# Altium PCB JVersiePCBSoldeerstation.PcbDoc
Units mil, origin at the board's own origin, x right, y up, seen from the top; angles counter-clockwise.
Board outline 3400 x 3820 mil, 2 copper layers (Top Layer, Bottom Layer); 64 components, 59 nets, 212 pads, 29 vias.
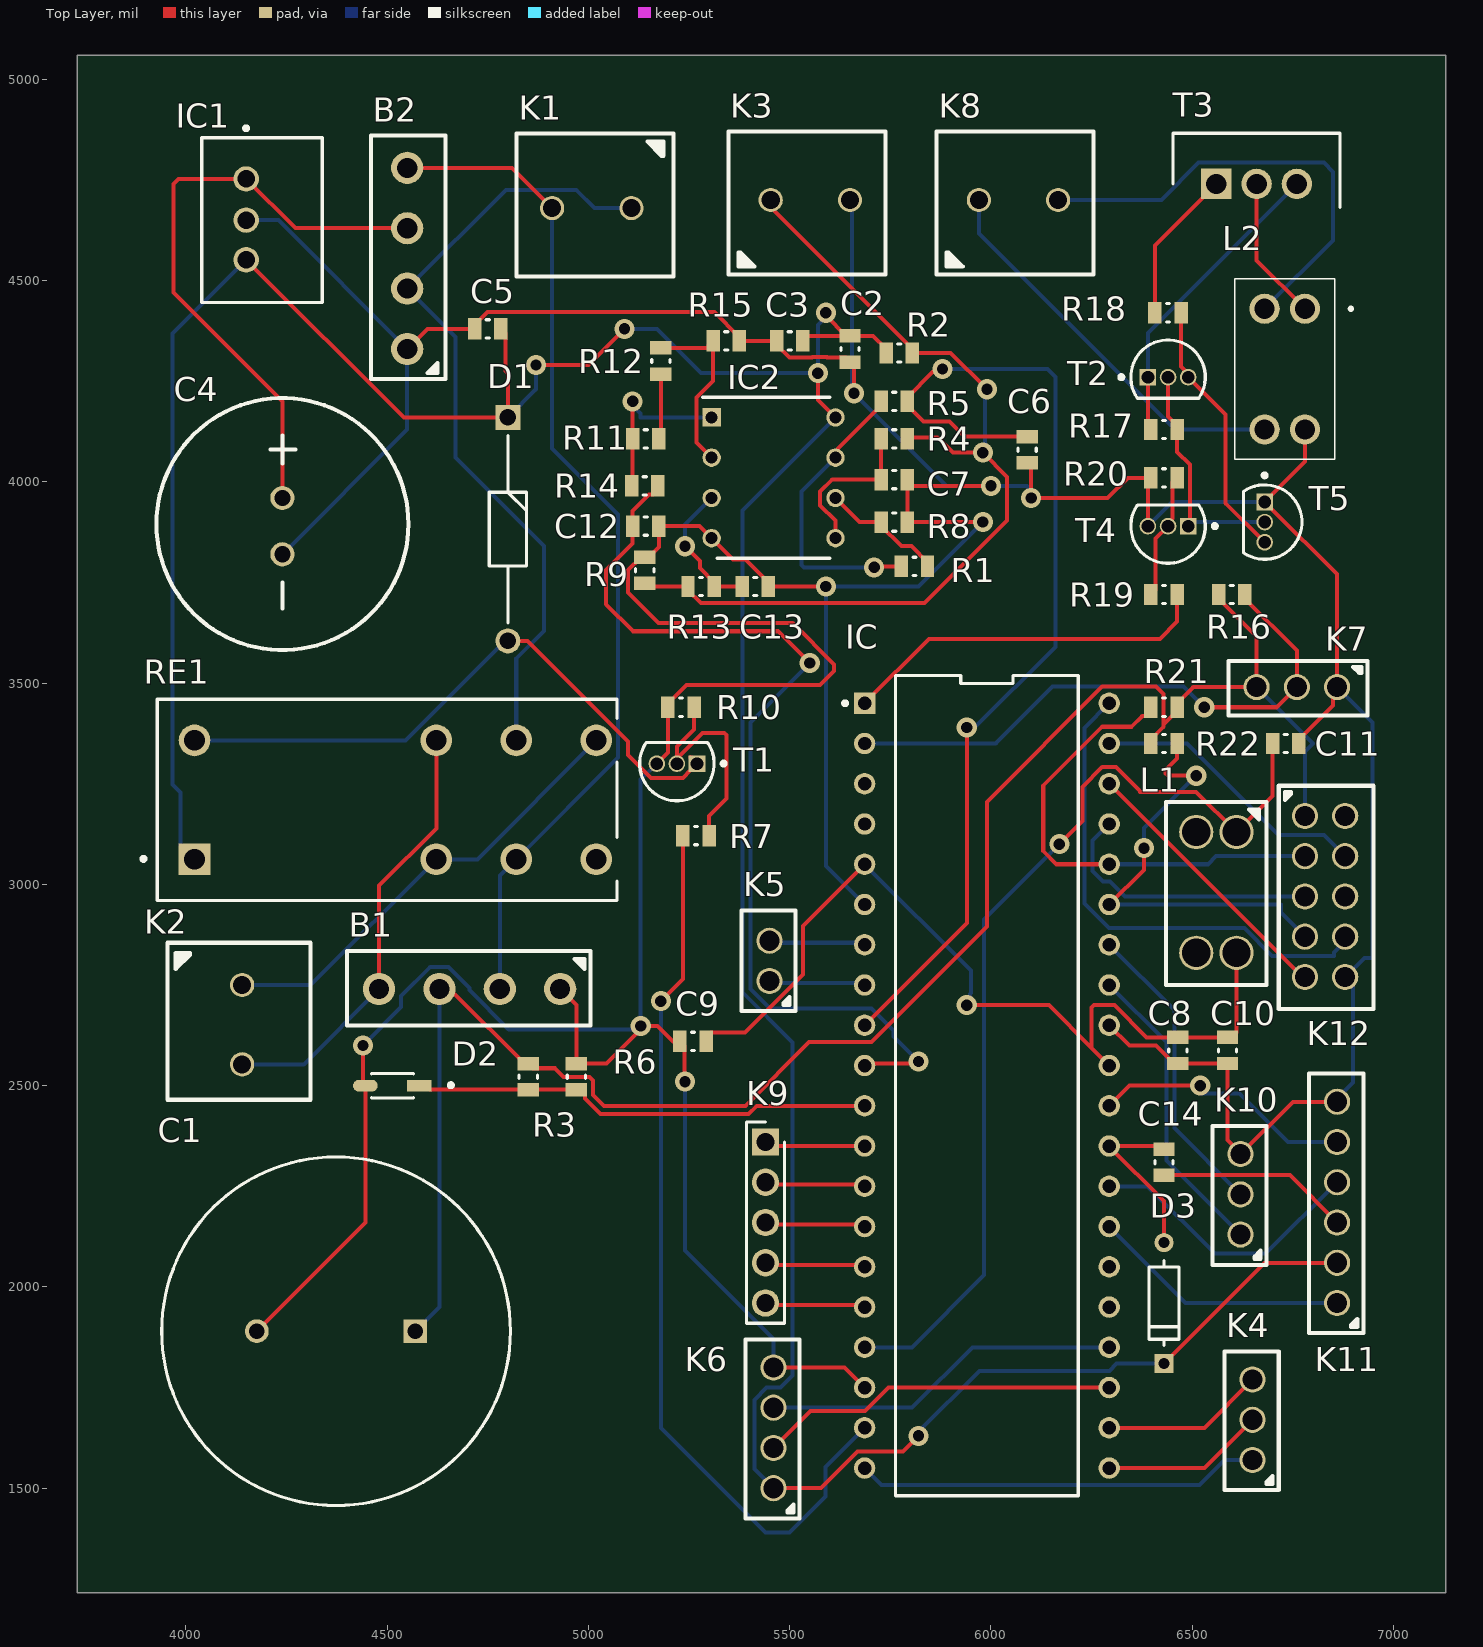
[diagram p0: Top Layer view]
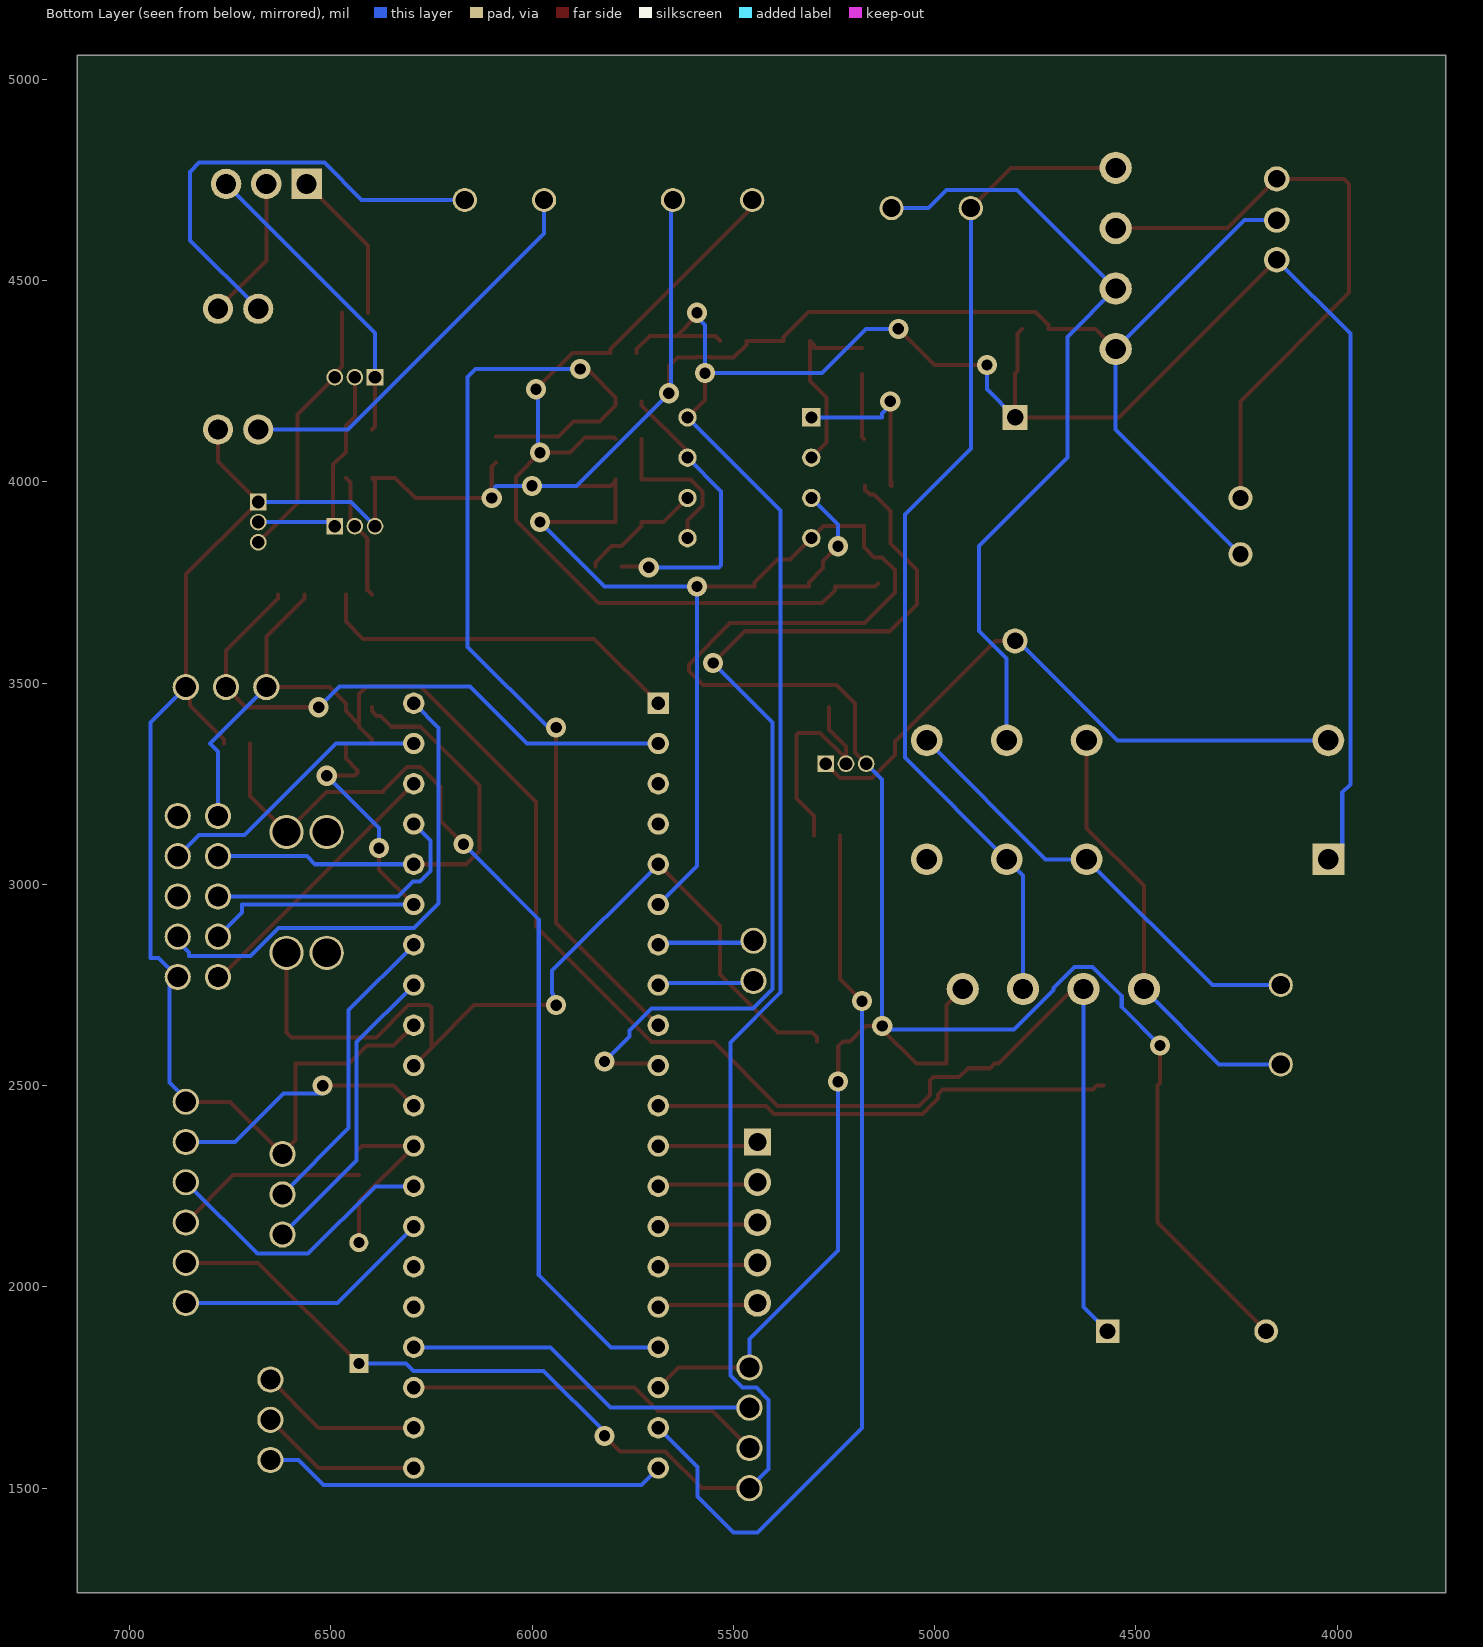
[diagram p1: Bottom Layer view, seen from below]

## Layer stack, top to bottom
Top Solder: solder mask 0.4, Solder Resist, Dk 3.5
Top Layer: signal copper 1.4
Dielectric 1: dielectric 12.6, FR-4, Dk 4.8
Bottom Layer: signal copper 1.4
Bottom Solder: solder mask 0.4, Solder Resist, Dk 3.5

## Board outline
3730,1240 7130,1240 7130,5060 3730,5060

## Design rules (kind name [scope] priority, off if disabled: settings)
Clearance [All] p1: gap=10 ignorepadtopadclearanceinfootprint=FALSE except(0: Arc-Hole Track-Hole SMDPad-Hole THPad-Hole Via-Hole Fill-Hole Poly-Hole Region-Hole Text-Hole)
PolygonConnect [All] p1: connectstyle=Relief reliefconductorwidth=10 reliefentries=4 polygonreliefangle="90 Angle" airgapwidth=10
RoutingVias [All] p1: holewidth=28 width=50 viastyle="Through Hole" minholewidth=28 minwidth=50 maxholewidth=28 maxwidth=50
SolderMaskExpansion [All] p1: expansion=4 istentingtop=FALSE
Width [All] p1: maxlimit=10 minlimit=10 preferedwidth=10
30 further rules are at their usual default settings.

## Classes and differential pairs
component class voeding: B1 B2 C1 C4 C5 D1 D2 IC1 K1 K2 R3 R6 R7 R10 RE1 T1
component class thermokoppel: K8 L2 R17 R18 R19 R20 T2 T3 T4 T5
component class soldeerboutaansturing: C2 C3 C6 C7 C12 C13 IC2 R1 R2 R4 R5 R8 R9 R11 R12 R13 R14 R15
component class cpuofmicrocontroller: C8 C9 C10 C11 C14 D3 IC K4 K5 K6 K7 K9 K10 K11 K12 L1 R16 R21 R22

## Components (designator, comment, footprint, x,y, rotation, side; value= is the part's Value field where it differs from the comment)
B1 "D6KB6U" D6KB6U 4930,2740 r180 top
B2 "D6KB6U" D6KB6U 4550,4330 r90 top
C1 "4700µ" CAPPRD1000W80D2200H3700 4570,1890 r180 top
C2 "" RESC2013X50X30LL20T20 5650,4330 r270 top value="0.10 μF"
C3 "" RESC2013X50X30LL20T20 5500,4350 r180 top
C4 "100µ" "100uF/50v aluminum electrolytic capacitor" 4240,3960 r270 top value="0.10 μF"
C5 "10µ" RESC2013X50X30LL20T20 4750,4380 r180 top value="0.10 μF"
C6 "10n" RESC2013X50X30LL20T20 6090,4080 r270 top
C7 "10n" RESC2013X50X30LL20T20 5760,4005.55 r0 top
C8 "100n" RESC2013X50X30LL20T20 6464.45,2587.52 r270 top
C9 "100n" RESC2013X50X30LL20T20 5260,2610 r180 top
C10 "10µ" RESC2013X50X30LL20T20 6587.57,2587.52 r270 top value="0.10 μF"
C11 "100n" RESC2013X50X30LL20T20 6732.48,3350 r0 top
C12 "10n" RESC2013X50X30LL20T20 5142.48,3890 r0 top
C13 "10n" RESC2013X50X30LL20T20 5414.83,3740 r0 top
C14 "100n" RESC2013X50X30LL20T20 6430,2310 r90 top
D1 "1N4007" DIOAD1405W86L465D235 4800,4160 r270 top
D2 "5V1" FP-SOD123-IPC_A 4513.06,2500 r180 top
D3 "1N4148" FP-017AG-MFG 6430,1960 r90 top
IC "ATMEGA4809-PF" FP-C04-016-MFG 5990,2500 r0 top
IC1 "" MURA-OKI-78SR-3 4150,4650 r270 top
IC2 "OPAMP" DIP781W56P254L950H533Q8N 5460,4010 r0 top
K1 "printkroonsteen 2pin" "printkroonsteen 2pin" 5107,4680 r180 top
K2 "printkroonsteen 2pin" "printkroonsteen 2pin" 4140,2750 r270 top
K3 "printkroonsteen 2pin" "printkroonsteen 2pin" 5453,4700 r0 top
K4 "" "PINHEADER, 1RIJIG,3-POLIG" 6650,1570 r90 top
K5 "" Pinheader,1rijig,2-polig 5450,2760 r90 top
K6 "" "PINHEADER, 1RIJIG,4-POLIG - duplicate" 5460,1500 r90 top
K7 "Pinheader,1rijig,3-polig" "PINHEADER, 1RIJIG,3-POLIG" 6860,3490 r180 top
K8 "" "printkroonsteen 2pin" 5970,4700 r0 top
K9 "" HDRV5W67P0X254_1X5_1270X241X858P 5440,2360 r270 top
K10 "" "PINHEADER, 1RIJIG,3-POLIG" 6620,2130 r90 top
K11 "" "PINHEADER, 1RIJIG,6-POLIG - duplicate - duplicate" 6860,1960 r90 top
K12 "Pinheader,2rijig,10-polig" "PINHEADER, 2RIJIG,10-POLIG - duplicate - duplicate - duplicate" 6780,3170 r270 top
L1 "10µH" "Laird CM2545x171B-10" 6610,3130 r180 top
L2 "CM2545X171B-10" CM2545X171B10 6780,4430 r180 top
R1 "18K" RESC2013X50X30LL20T20 5810,3790 r0 top
R2 "1M" RESC2013X50X30LL20T20 5772.48,4320 r180 top
R3 "68K" RESC2013X50X30LL20T20 4850.66,2522.48 r90 top
R4 "5K6" RESC2013X50X30LL20T20 5760,4106.9 r0 top
R5 "5K6" RESC2013X50X30LL20T20 5760,4200 r180 top
R6 "10K" RESC2013X50X30LL20T20 4970,2522.48 r270 top
R7 "10K" RESC2013X50X30LL20T20 5267.52,3121.04 r0 top
R8 "100" RESC2013X50X30LL20T20 5760,3900 r180 top
R9 "10M" RESC2013X50X30LL20T20 5140,3780 r270 top
R10 "4K7" RESC2013X50X30LL20T20 5230,3440 r0 top
R11 "10K" RESC2013X50X30LL20T20 5142.48,4106.9 r0 top
R12 "18K" RESC2013X50X30LL20T20 5180,4300 r90 top
R13 "5K6" RESC2013X50X30LL20T20 5280,3740 r180 top
R14 "5K6" RESC2013X50X30LL20T20 5140,3990 r0 top
R15 "100" RESC2013X50X30LL20T20 5342.31,4350 r180 top
R16 "4k7" RESC2013X50X30LL20T20 6597.97,3720 r0 top
R17 "4K7" RESC2013X50X30LL20T20 6430,4130 r0 top
R18 "100" RESC2013X50X30LL20T20 6440,4420 r180 top
R19 "10k" RESC2013X50X30LL20T20 6430,3720 r180 top
R20 "4K7" RESC2013X50X30LL20T20 6430,4010 r180 top
R21 "4k7" RESC2013X50X30LL20T20 6430,3440 r0 top
R22 "4k7" RESC2013X50X30LL20T20 6430,3350 r180 top
RE1 "" FP-RT424005-MFG 4500,3210 r0 top
T1 "BC547C" ONSC-TO-92-3-29-11 5220,3300 r180 top
T2 "BC547C" ONSC-TO-92-3-29-11 6440,4260 r0 top
T3 "IRF9Z34NPBF" TO254P469X1042X1967-3P 6560,4740 r0 top
T4 "BC547C" ONSC-TO-92-3-29-11 6440,3890 r180 top
T5 "BC557C" ONSC-TO-92-3-29-11 6680,3900 r270 top

## Footprints (in the part's own frame and the unit in brackets; to place one, negate y for a bottom-side part, rotate by r counter-clockwise, add the part's x,y. Pads: shape width x height; smd on the part's side, far side on the other; paste and mask are expansions set on the pad)
"100uF/50v aluminum electrolytic capacitor" [mil]
  round 60 hole 40: 1(0,0) 2(140,0)
  silkscreen extent -248,-313 378,313
CAPPRD1000W80D2200H3700 [mm]
  rect 1.5x1.5 hole 1: 1(0,0)
  round 1.5 hole 1: 2(10,0)
  silkscreen extent -6,-11 16,11, body extent -6.24,-11.25 16.24,11.25, height 38.01
CM2545X171B10 [mil]
  round 75 hole 50: 1(0,0) 2(100,0) 3(100,300) 4(0,300)
  silkscreen extent -118,-74 174,374, body extent -74,-74 174,374, height 378
D6KB6U [mil] "bridge rectifier"
  round 80 / inner round 60 / far side round 80 hole 50: 1(0,0) 2(150,0) 3(300,0) 4(450,0)
  silkscreen extent -75,-95 530,90
DIOAD1405W86L465D235 [mm]
  rect 1.575x1.575 hole 1.05: 1(0,0)
  round 1.575 hole 1.05: 2(14.1,0)
  silkscreen extent 1.14,-1.17 12.96,1.17, body extent -0.43,-1.34 14.48,1.34, height 2.7
DIP781W56P254L950H533Q8N [mm]
  rect 1.158x1.158 hole 0.758: 1(-3.905,3.81)
  round 1.158 hole 0.758: 2(-3.905,1.27) 3(-3.905,-1.27) 4(-3.905,-3.81) 5(3.905,-3.81) 6(3.905,-1.27) 7(3.905,1.27) 8(3.905,3.81)
  silkscreen extent -4.48,-5.08 3.56,5.08, body extent -4.04,-4.75 4.04,4.75, height 5.33
FP-017AG-MFG [mm]
  rect 1.2x1.2 hole 0.7 paste-1000 mask+0: 1(-3.813,0)
  round 1.2 hole 0.7 paste-1000 mask+0: 2(3.813,0)
  silkscreen extent -2.68,-0.95 2.68,0.95, body extent -4.51,-1.05 4.51,1.05, height 0.25
FP-C04-016-MFG [mm]
  rect 1.35x1.35 hole 0.85 paste-1000 mask+0: 1(-7.715,24.13)
  round 1.35 hole 0.85 paste-1000 mask+0: 2(-7.715,21.59) 3(-7.715,19.05) 4(-7.715,16.51) 5(-7.715,13.97) 6(-7.715,11.43) 7(-7.715,8.89) 8(-7.715,6.35) 9(-7.715,3.81) 10(-7.715,1.27) 11(-7.715,-1.27) 12(-7.715,-3.81) 13(-7.715,-6.35) 14(-7.715,-8.89) 15(-7.715,-11.43) 16(-7.715,-13.97) 17(-7.715,-16.51) 18(-7.715,-19.05) 19(-7.715,-21.59) 20(-7.715,-24.13) 21(7.715,-24.13) 22(7.715,-21.59) 23(7.715,-19.05) 24(7.715,-16.51) 25(7.715,-13.97) 26(7.715,-11.43) 27(7.715,-8.89) 28(7.715,-6.35) 29(7.715,-3.81) 30(7.715,-1.27) 31(7.715,1.27) 32(7.715,3.81) 33(7.715,6.35) 34(7.715,8.89) 35(7.715,11.43) 36(7.715,13.97) 37(7.715,16.51) 38(7.715,19.05) 39(7.715,21.59) 40(7.715,24.13)
  silkscreen extent -9.06,-25.88 5.76,25.88, body extent -8.49,-26.71 8.49,26.71, height 0.25
FP-RT424005-MFG [mm]
  round 2 hole 1.3 paste-1000 mask+0: 11(8.15,-3.75) 12(3.11,-3.75) 14(13.19,-3.75) 21(8.15,3.75) 22(3.11,3.75) 24(13.19,3.75) A2(-12.15,3.75)
  rect 2x2 hole 1.3 paste-1000 mask+0: A1(-12.15,-3.75)
  silkscreen extent -15.5,-6.35 14.5,6.35, body extent -14.6,-6.45 14.6,6.45, height 0.25
FP-SOD123-IPC_A [mil]
  rect 61.32x29.23 smd paste+0 mask+0: 1(-66.94,0)
  rrect100% 61.32x29.23 smd paste+0 mask+0: 2(66.94,0)
  silkscreen extent -150,-31 52,31, body extent -117,-50 117,50, height 10
HDRV5W67P0X254_1X5_1270X241X858P [mm]
  rect 1.725x1.725 hole 1.15: 1(0,0)
  round 1.725 hole 1.15: 2(2.54,0) 3(5.08,0) 4(7.62,0) 5(10.16,0)
  silkscreen extent -1.27,-1.2 11.43,1.2, body extent -1.27,-1.2 11.43,1.2, height 8.58
"Laird CM2545x171B-10" [mil] "spoel 2"
  round 85 hole 70: 1(0,0) 2(100,0) 3(100,300) 4(0,300)
  silkscreen extent -75,-75 175,380
MURA-OKI-78SR-3 [mm] "THMT, 3-Leads, Body 10.4x7.6mm"
  round 1.6 hole 1.1: 1(-2.6,0) 2(0,0) 3(2.5,0)
  silkscreen extent -5.92,-2.8 5.2,4.8, body extent -5.2,-2.8 5.2,4.8, height 16.5
ONSC-TO-92-3-29-11 [mm] "TO, 3-Leads, Body Dia 4.7mm, Pitch 1.27mm"
  rect 1.05x1.05 hole 0.8: 1(-1.27,0)
  round 1.05 hole 0.8: 2(0,0) 3(1.27,0)
  silkscreen extent -3.08,-1.34 2.35,2.35, body extent -2.35,-1.33 2.36,2.36, height 7.87
Pinheader,1rijig,2-polig [mil]
  round 65 hole 50: 1(0,0) 2(100,0)
  silkscreen extent -75,-65 175,70
"PINHEADER, 1RIJIG,3-POLIG" [mil]
  round 65 hole 50: 1(0,0) 2(100,0) 3(200,0)
  silkscreen extent -75,-65 270,70
"PINHEADER, 1RIJIG,4-POLIG - duplicate" [mil]
  round 65 hole 50: 1(0,0) 2(100,0) 3(200,0) 4(300,0)
  silkscreen extent -75,-65 370,70
"PINHEADER, 1RIJIG,6-POLIG - duplicate - duplicate" [mil]
  round 65 hole 50: 1(0,0) 2(100,0) 3(200,0) 4(300,0) 5(400,0) 6(500,0)
  silkscreen extent -75,-65 570,70
"PINHEADER, 2RIJIG,10-POLIG - duplicate - duplicate - duplicate" [mil]
  round 65 hole 50: 1(0,0) 2(100,0) 3(200,0) 4(300,0) 5(400,0) 6(0,100) 7(100,100) 8(200,100) 9(300,100) 10(400,100)
  silkscreen extent -75,-65 480,170
"printkroonsteen 2pin" [mil]
  round 60 hole 45: 1(0,0) 2(197,0)
  silkscreen extent -105,-185 285,170
RESC2013X50X30LL20T20 [mm] "Chip Resistor, 2-Leads, Body 2.00x1.25mm, IPC High Density"
  rect 0.85x1.35 smd: 1(-0.825,0) 2(0.825,0)
  silkscreen extent -0.1,-0.58 0.1,0.58, body extent -1.1,-0.72 1.1,0.72, height 0.5
TO254P469X1042X1967-3P [mm]
  rect 1.92x1.92 hole 1.28: 1(0,0)
  round 1.92 hole 1.28: 2(2.54,0) 3(5.08,0)
  silkscreen extent -2.73,-1.5 7.81,3.19, body extent -2.67,-1.5 7.75,3.19, height 18.84

## Part data
C1: library part CondensatorGroot, "Capacitor Polarised", Manufacturer_Name=KEMET, Manufacturer_Part_Number=ESK478M050AQ3AA, Mouser Part Number=80-ESK478M050AQ3AA, Datasheet Link=https://content.kemet.com/datasheets/KEM_A4004_ESK.pdf, Height=37mm, Mouser Price/Stock=https://www.mouser.co.uk/ProductDetail/KEMET/ESK478M050AQ3AA?qs=gt1LBUVyoHl7SM9dsUCJjA%3D%3D
C2: library part "Elektrolytische Capacitor", "CAP CER 0.1UF 10V X5R 0402", Capacitance="0.10 μF", Manufacturer=Kemet, Manufacturer Part Number=C0402C104K8PACTU, Package=C0402-BB, Temperature="-55°C to +125°C", Temperature Characteristic=X5R, Temperature Coefficient=15%, Temperature Range High=+125°C, Temperature Range Low=-55°C, Tolerance=0.1, Voltage Rating="10 V", Automotive=No, Category=Cap, ComponentLink2Description=Datasheet, ComponentLink2URL=https://content.kemet.com/datasheets/KEM_C1002_X7R_SMD.pdf, Device Class L1="Passive Components", Device Class L2=Capacitors, Device Class L3="Ceramic Capacitors", Digikey Description="CAP CER 0.1UF 10V X5R 0402", Height=0.55mm, Ipc Land Pattern Name=CAPC10050X50, Lead Free=Yes, Material=Ceramic, Mouser Description="Capacitor 100 nF 10 VDC 0402 | KEMET C0402C104K8PACTU (Capacitor 100 nF 10 VDC 0402 Ceramic Capacitors).", Octopart=https://octopart.com/c0402c104k8pactu-kemet-140039, RoHS=TRUE
C3 C14: library part "Ceramische Capacitor"
C4 C5 C10: library part Capacitor, "CAP CER 0.1UF 10V X5R 0402", Capacitance="0.10 μF", Manufacturer=Kemet, Manufacturer Part Number=C0402C104K8PACTU, Package=C0402-BB, Temperature="-55°C to +125°C", Temperature Characteristic=X5R, Temperature Coefficient=15%, Temperature Range High=+125°C, Temperature Range Low=-55°C, Tolerance=0.1, Voltage Rating="10 V", Automotive=No, Category=Cap, ComponentLink2Description=Datasheet, ComponentLink2URL=https://content.kemet.com/datasheets/KEM_C1002_X7R_SMD.pdf, Device Class L1="Passive Components", Device Class L2=Capacitors, Device Class L3="Ceramic Capacitors", Digikey Description="CAP CER 0.1UF 10V X5R 0402", Height=0.55mm, Ipc Land Pattern Name=CAPC10050X50, Lead Free=Yes, Material=Ceramic, Mouser Description="Capacitor 100 nF 10 VDC 0402 | KEMET C0402C104K8PACTU (Capacitor 100 nF 10 VDC 0402 Ceramic Capacitors).", Octopart=https://octopart.com/c0402c104k8pactu-kemet-140039, RoHS=TRUE
C6 C7 C8 C9 C11 C12 C13: library part capacitor2
D1: library part 1N4007-E3_73, "Diode", Arrow Part Number=1N4007-E3/73, Manufacturer_Name=Vishay, Mouser Part Number=625-1N4007-E3/73, Arrow Price/Stock=https://www.arrow.com/en/products/1n4007-e373/vishay?region=europe, Datasheet Link=https://mouser.componentsearchengine.com/Datasheets/2/1N4007-E3_73.pdf, Manufacturer_Part_Number=1N4007-E3/73, Mouser Price/Stock=https://www.mouser.co.uk/ProductDetail/Vishay-General-Semiconductor/1N4007-E3-73?qs=N4vtoAxH%2FSqT3Ng3e4K0Gw%3D%3D
D2: library part Zenerdiode, "DIODE ZENER 5.1V 500MW SOD123", Forward Current=10mA, Manufacturer="Diodes Incorporated", Manufacturer Part Number=BZT52C5V1-7-F, Max Junction Temp=+150°C, Max Reverse Leakage Current=2uA, Max Zener Voltage=5.4V, Nom Zener Voltage=5.1V, Package=SOD123, Power Dissipation=370mW, Temperature="-65°C to +150°C", Temperature Range Low=-65°C, Automotive=No, Automotive Grade=NA, Category=Diode, ComponentLink2Description=Datasheet, ComponentLink2URL=https://www.diodes.com/assets/Datasheets/ds18004.pdf, Device Class L1="Discrete Semiconductors", Device Class L2=Diodes, Device Class L3="Zener Diodes", Digikey Description="DIODE ZENER 5.1V 500MW SOD123", Footprint Url=https://www.diodes.com/assets/Package-Files/SOD123.pdf, Height=1.45mm, Lead Free=Yes, Mouser Description="Zener Diodes 5.1V 500mW", Octopart=https://octopart.com/bzt52c5v1-7-f-diodes+inc.-326718, RoHS=TRUE, Standoff Height=0mm, Temperature Range High=+150°C, Zener Impedance=60Ω
D3: "DIODE GEN PURP 100V 200MA DO35/1N4148", Average Rectified Current=200mA, Capacitance=4pF, Case/Package=DO-35, Current=4A, Forward Current=300mA, Forward Voltage=1V, Max Forward Surge Current (Ifsm)=1A, Max Operating Temperature=175°C, Max Power Dissipation=500mW, Max Repetitive Reverse Voltage (Vrrm)=100V, Max Reverse Current=5uA, Min Operating Temperature=-65°C, Package Quantity=2000, Contact Plating=Tin, Current Rating=200mA, Diameter=1.91mm, Element Configuration=Single, Height=4.56mm, Lead Free="Lead Free", Length=4.56mm, Max Reverse Voltage (DC)=100V, Max Surge Current=4A, Mount="Through Hole", Number of Pins=2, Output Current=200mA, Outside Diameter=1.85mm, Packaging=Bulk, Peak Non-Repetitive Surge Current=4A, Polarity=Standard, Power Dissipation=500mW, Radiation Hardening=No, REACH SVHC="No SVHC", Recovery Time=4ns, Reverse Recovery Time=4ns, Reverse Voltage=100V, Series=-, Voltage=100V, Voltage Rating (DC)=100V, Weight=0.01lb, Width=1.91mm
IC: library part aTmega4809-PF, "IC MCU 8BIT 48KB FLASH 40DIP", RoHS Compliant=Yes
IC1: library part OKI-78SR-5/1.5-W36-C, "Non-Isolated DC/DC Converter, 7.5 W, 7 to 36 V, 1.5 A, -40 to 85 degC, 3-Pin THD, RoHS", Current - Output (Max)=1.5A, Manufacturer=Murata, Operating Temperature=-40degC~85degC, Package / Case=3-SIPModule, Power (Watts) - Manufacture Series=8W, Voltage - Input (Max)=36V, Voltage - Input (Min)=7V, Voltage - Isolation=-, Voltage - Output 1=5V, Applications=ITE(Commercial), Category=PowerSupplies-BoardMount, Datasheet URL=https://datasheet.ciiva.com/8006/1790439-8006672.pdf, Datasheet Version=Oct-13, Efficiency=90.5%, Family=DCDCConverters, Features=SCP, Manufacturer URL=http://www.murata.com/, Mounting Type=ThroughHole, Number of Outputs=1, Packaging=Tube, Power (Watts) - Max=8W, Series=Okami™OKI-78SR, Size / Dimension="0.41\"Lx0.30\"Wx0.65\"H(10.4mmx7.6mmx16.5mm)", Type=LinearRegulatorReplacement, Voltage - Output 2=-, Voltage - Output 3=-
IC2: "CMP-0187-00133-3", Case/Package=PDIP, Input Bias Current=1pA, Input Offset Voltage (Vos)=4.5mV, Max Operating Temperature=125°C, Max Supply Voltage=6V, Min Operating Temperature=-40°C, Min Supply Voltage=1.8V, Nominal Supply Current=100uA, Operating Supply Voltage=5.5V, Output Current=23mA, Package Quantity=60, Power Supply Rejection Ratio (PSRR)=86dB, Voltage Gain=112dB, Amplifier Type="GENERAL PURPOSE", Bandwidth=1MHz, Common Mode Rejection Ratio=60dB, Gain Bandwidth Product=1MHz, Height=3.3mm, Input Offset Voltage-Max=4.5mV, Lead Free="Lead Free", Length=9.27mm, Mount="Through Hole", Number of Amplifiers=2, Number of Channels=2, Number of Circuits=2, Number of Elements=2, Number of Pins=8, Operating Supply Current=100uA, Output Current per Channel=23mA, Packaging=Rail/Tube, Radiation Hardening=No, REACH SVHC="No SVHC", RoHS Compliant=Yes, Slew Rate=0.6V/µs, Slew Rate-Nom=0.6V/µs, Supply Current=100uA, Technology=CMOS, Unity Gain Bandwidth Product=1MHz, Width=6.35mm
K4 K10: library part Pinheader,1rijig,3-polig
K5: library part Pinheader,1rijig,2-polig
K6: library part Pinheader,1rijig,4-polig
K8: library part "printkroonsteen 2pin"
K9: library part "5PIN HEADERmale", "Connector", Arrow Part Number=68000-105HTLF, Manufacturer_Name="Amphenol Communications Solutions", Mouser Part Number=649-68000-105HTLF, Arrow Price/Stock=https://www.arrow.com/en/products/68000-105htlf/amphenol-fci, Datasheet Link=https://cdn.amphenol-cs.com/media/wysiwyg/files/drawing/68000.pdf, Height=8.58mm, Manufacturer_Part_Number=68000-105HTLF, Mouser Price/Stock=https://www.mouser.co.uk/ProductDetail/Amphenol-FCI/68000-105HTLF?qs=w%2Fv1CP2dgqrYgNyQVoiqDw%3D%3D
K11: library part Pinheader,2rijig,6-polig
L1: library part spoelL1
L2: "Transformer", Manufacturer_Name="Laird Technologies", Mouser Part Number=N/A, Arrow Part Number=CM2545X171B-10, Arrow Price/Stock=https://www.arrow.com/en/products/cm2545x171b-10/laird-technologies, Datasheet Link=https://datasheet.datasheetarchive.com/originals/dk/DKDS-7/122753.pdf, Height=9.5mm, Manufacturer_Part_Number=CM2545X171B-10, Mouser Price/Stock=https://www.mouser.co.uk/ProductDetail/Laird/CM2545X171B-10?qs=PzGy0jfpSMtNfkEypgU65A%3D%3D
R1 R2 R3 R4 R5 R6 R7 R8 R9 R10 R11 R12 R13 R14 R15 R16 R17 R18 R19 R20 R21 R22: library part weerstand, Manufacturer="Vishay Dale", Part Number=CRCW08050000Z0EA
RE1: library part RT424005, "RELAY GENERAL PURPOSE DPDT 8A 5V", Ambient Temperature Range High=+85°C, Ambient Temperature Range Low=-40°C, Coil Power=403mW, Coil Resistance=62Ω, Coil Voltage=5V, Current Rating=8A, Manufacturer="TE Connectivity", Automotive=No, Category=Relay, Coil Type=Non-Latching, ComponentLink2Description=Datasheet, ComponentLink2URL=https://www.te.com/commerce/DocumentDelivery/DDEController?Action=showdoc&DocId=Data+Sheet%7FRT2%7F1014%7Fpdf%7FEnglish%7FENG_DS_RT2_1014.pdf%7F5-1393243-9, Device Class L1=Electromechanical, Device Class L2=Relays, Device Class L3="Power Relays", Digikey Description="RELAY GENERAL PURPOSE DPDT 8A 5V", Height=15.7mm, Lead Free=Yes, Manufacturer Part Number=RT424005, Mouser Description="General Purpose Relay, Rt2 Series, Power, Non Latching, Dpdt, 5 Vdc, 8 A Rohs Compliant: Yes", Number Of Contacts=2, Octopart=https://octopart.com/5-1393243-9-te+connectivity-41835766, Package=RT424005, RoHS=TRUE, Throw Configuration=DPDT
T1 T2 T4: "Amplifier Transistor, NPN Silicon, 3-Pin TO-92, Bulk Box", Manufacturer="On Semiconductor", ComponentLink1Description="Manufacturer URL", ComponentLink1URL=http://www.onsemi.com/, ComponentLink2Description=Datasheet, ComponentLink2URL=http://www.onsemi.com/pub_link/Collateral/BC546-D.PDF, ComponentLink3Description="Package Specification", ComponentLink3URL=http://www.onsemi.cn/pub_link/Collateral/2N6426-D.PDF, DatasheetVersion="Rev. 7", fT Min (MHz)=150, IC Continuous (A)=0.1, Mounting Technology="Through Hole", PackageDescription="3-Pin Transistor Outline, Body 4.825 x 3.685 mm, Pitch 1.27 mm", PackageReference=TO-92-3-29-11_AM_SL, PackageVersion="Rev. AM", Packing="Bulk Box", PartNumber=BC547C, Polarity=NPN, RoHS=FALSE
T3: "MOSFET (P-Channel)", Manufacturer_Name=Infineon, Mouser Part Number=942-IRF9Z34NPBF, Arrow Part Number=IRF9Z34NPBF, Arrow Price/Stock=https://www.arrow.com/en/products/irf9z34npbf/infineon-technologies-ag?region=nac, Datasheet Link=https://www.infineon.com/dgdl/irf9z34npbf.pdf?fileId=5546d462533600a40153561220af1ddd, Height=4.69mm, Manufacturer_Part_Number=IRF9Z34NPBF, Mouser Price/Stock=https://www.mouser.co.uk/ProductDetail/Infineon-Technologies/IRF9Z34NPBF?qs=9%252BKlkBgLFf16a%2FvlD%252BMCtQ%3D%3D
T5: "Amplifier Transistor, PNP Silicon, 3-Pin TO-92, Bulk Box", Manufacturer="On Semiconductor", ComponentLink1Description="Manufacturer URL", ComponentLink1URL=http://www.onsemi.com/, ComponentLink2Description=Datasheet, ComponentLink2URL=http://www.onsemi.com/pub_link/Collateral/BC556B-D.PDF, ComponentLink3Description="Package Specification", ComponentLink3URL=http://www.onsemi.cn/pub_link/Collateral/2N6426-D.PDF, DatasheetVersion="Rev. 3", IC Continuous (A)=-0.1, Mounting Technology="Through Hole", PackageDescription="3-Pin Transistor Outline, Body 4.825 x 3.685 mm, Pitch 1.27 mm", PackageReference=TO-92-3-29-11_AM_SL, PackageVersion="Rev. AM", Packing="Bulk Box", PartNumber=BC557C, Polarity=PNP, RoHS=FALSE

## Via types
v1: diameter 50, hole 28, Top Layer to Bottom Layer, 29 vias

## Nets (pads, with @x,y where several pads share a name; then routed paths per layer and width w, separated by ;. In a path a pad name is that pad's centre, name@x,y a point inside that pad or via, vN(x,y) a via of type N, cw(c..) or ccw(c..) an arc to the next point about the centre after c; other vN are vias at no path point)
+5V: C2.1 C3.1 C5.1 D1.1 D3.1 IC1.3 IC2.8 K6.1 K11.2 R2.2 RE1.A1 | length 8695.1
  Top Layer w10: IC1.3 4541.57,4160 D1.1 4800,4269.32 4794.21,4275.11 4794.21,4368.27 C5.1 ; v1(4870,4290) 5000,4290 v1(5090,4380) ; K6.1 5577.45,1500 5669.03,1591.57 5781.57,1591.57 v1(5820,1630) ; C3.1 5532.48,4350.75 5544.21,4362.48 C2.1@5640.16,4362.48 ; v1(5570,4270) 5570,4203.74 IC2.8 ; v1(5590,4420) 5590,4412.64 C2.1@5640.16,4362.48 ; R2.2 5740,4329.84 5707.36,4362.48 C2.1 C2.1@5640.16,4362.48 ; D3.1 6680.12,2060 K11.2
  Bottom Layer w10: RE1.A1 3987.28,3096.73 3987.28,3228.45 3967.28,3248.45 3967.28,4368.86 IC1.3 ; D1.1 4870,4230 v1(4870,4290) ; v1(5090,4380) 5170,4380 5280,4270 v1(5570,4270) 5570,4389.18 5590,4409.18 v1(5590,4420) ; K6.1 5412.5,1547.5 5412.5,1719.68 5442.82,1750 5477.18,1750 5507.5,1780.32 5507.5,2607.04 5382.5,2732.04 5382.5,3928.76 IC2.8 ; v1(5820,1630) 5819.14,1630.86 5819.14,1639.14 5971.57,1791.57 6294.12,1791.57 6312.43,1809.88 D3.1
GND: B1.1 B2.1 C1.2 C2.2 C3.2 C4.2 C5.2 C6.2 C7.2 C8.2 C9.2 C10.2 C11.2 C12.2 C13.2 D2.2 IC1.2 IC2.4 IC.6 IC.18 IC.32 K3.2 K6.4 K7.1 K10.3 K11.6 K12.10 L2.4 R6.1 R8.1 R9.1 R10.1 R15.1 R20.2 T1.3 T4.3 T5.1 | length 14995.1
  Top Layer w10: C1.2 4446.11,2159.81 D2.2 4440,2506.11 v1(4440,2600) ; B2.1 4600,4380 C5.2 4717.52,4389.84 4749.25,4421.57 5313.06,4421.57 5374.79,4359.84 R15.1 C3.2 5467.52,4340.16 5499.25,4308.43 5555.43,4308.43 5557,4310 5592.34,4310 5593.09,4309.25 5638.27,4309.25 C2.2 5660,4287.52 v1(5660,4220) ; B1.1 4970,2700 R6.1 5044.96,2554.96 5130,2640 v1(5130,2648.43) 5171.57,2648.43 5210,2610 C9.2 5239.25,2598.27 5239.25,2520.75 5240,2520 v1(5240,2510) ; T1.3 5170,3300.44 5197.52,3327.96 R10.1 5197.52,3449.84 5243.46,3495.79 5575.79,3495.79 5610,3530 5610,3546.57 5507.74,3648.83 5174.17,3648.83 5098.43,3724.57 5098.43,3780.75 5130.16,3812.48 R9.1 5149.84,3812.48 5174.96,3837.6 C12.2 5276.26,3890 IC2.4 5358.88,3807.38 5389.77,3807.38 5447.31,3749.84 C13.2 v1(5590,3740) ; K6.4 5636.25,1800 IC.18 ; C7.2 C7.2@5792.48,4001.73 ; v1(5980,3900) R8.1 C7.2@5792.48,4001.73 ; v1(6000,3990) 5804.21,3990 C7.2@5792.48,4001.73 ; C6.2 6100,4037.52 v1(6100,3960) 6290,3960 6340,4010 R20.2 6390,4002.48 T4.3 ; IC.32 6343.75,2600 6409.65,2600 6454.61,2555.04 C8.2 C10.2 6587.57,2364.74 6620,2332.31 K10.3 6750,2460 K11.6 ; C11.2 6764.96,3359.84 6849.48,3444.36 6849.48,3479.48 K7.1 6860,3770.44 6696.11,3934.33 6695.67,3934.33 T5.1 6780,4050 L2.4
  Bottom Layer w10: IC1.2 4230,4650 B2.1 4550,4130 C4.2 ; v1(4440,2600) 4535,2695 4535,2722.78 4607.22,2795 4652.78,2795 4705,2742.78 4705,2737.22 4802.22,2640 5130,2640 v1(5130,2648.43) 5130,3260 T1.3 ; v1(5240,2510) 5240,2090.76 5460,1870.76 K6.4 ; K3.2 5655,4695 5655,4225 v1(5660,4220) 5890,3990 v1(6000,3990) 6090,3990 6092.35,3987.65 6092.35,3967.65 v1(6100,3960) ; IC.6 5590,3046.25 v1(5590,3740) 5820,3740 v1(5980,3900) ; T4.3 6390,3890.44 6449.56,3950 T5.1 ; K11.6 6860,2468.22 6900,2508.22 K12.10@6900,2770 ; K7.1 6947.5,3402.5 6947.5,2817.5 6927.5,2817.5 K12.10
NetB1_2: B1.2 B2.4 K1.2 RE1.11 | length 2530.9
  Top Layer w10: B2.4 4810,4780 K1.2
  Bottom Layer w10: B1.2 4780,3021.5 RE1.11 5073.66,3315.16 5073.66,3918.96 4910,4082.62 K1.2
NetB1_4: B1.4 K2.2 RE1.22 | length 1094.1
  Top Layer w10: B1.4 4480,2996.81 4622.44,3139.25 RE1.22
  Bottom Layer w10: K2.2 4293,2553 B1.4
NetB2_2: B2.2 K1.1 RE1.21 | length 1969
  Bottom Layer w10: RE1.21 4820.87,3560.69 4890,3629.82 4890,3840 4670,4060 4670,4360 B2.2 4795,4725 4969.92,4725 5014.92,4680 K1.1
NetB2_3: B2.3 C4.1 IC1.1 | length 1527.6
  Top Layer w10: C4.1 4240,4200 3970,4470 3970,4740 3982.36,4752.36 IC1.1 4272.36,4630 B2.3
NetC6_1: C6.1 IC.9 R5.1 | length 2577
  Top Layer w10: IC.9 5940,2903.75 v1(5940,3390) ; v1(5880,4280) 5872.35,4272.35 5854.98,4272.35 5792.48,4209.84 R5.1 5792.48,4190.16 5832.64,4150 5896.57,4150 5934.09,4112.48 C6.1
  Bottom Layer w10: v1(5880,4280) 6140,4280 6160,4260 6160,3590 5954.14,3384.14 5945.86,3384.14 v1(5940,3390)
NetC7_1: C7.1 IC2.5 R4.1 | length 396.6
  Top Layer w10: IC2.5 5613.74,3903.75 5575.94,3941.54 5575.94,3975.66 5605.84,4005.55 C7.1 R4.1
NetC8_1: C8.1 C9.1 C10.1 IC.5 IC.31 L1.4 | length 2230.5
  Top Layer w10: C9.1 5292.48,2619.84 5304.21,2631.57 5388.75,2631.57 5533.37,2776.2 5533.37,2897.12 IC.5 ; v1(5940,2700) 6143.75,2700 6250,2593.75 ; IC.31 6250,2593.75 ; L1.4 6610,2632.59 6597.41,2620 C10.1 C8.1 6386.44,2620 6306.44,2700 6255.86,2700 6250,2694.14 6250,2593.75
  Bottom Layer w10: IC.5 5950,2786.25 5950,2730 5947.65,2727.65 5947.65,2707.65 v1(5940,2700)
NetC11_1: C11.1 IC.17 L1.1 | length 2414.3
  Top Layer w10: v1(6170,3100) 6227.09,3157.09 6227.09,3242.14 6276.53,3291.57 6310.97,3291.57 6370,3232.55 6370,3230 6510,3230 L1.1 6700,3220 C11.1
  Bottom Layer w10: IC.17 5804.14,1850 5983.24,2029.1 5983.24,2913.24 v1(6170,3100)
NetC12_1: C12.1 IC.10 R14.2 | length 2429
  Top Layer w10: R14.2 5172.48,3980.16 5160.75,3968.43 5150.91,3968.43 5110,3927.52 C12.1 5110,3847 5044.14,3781.14 5044.14,3695.86 5111.17,3628.83 5471.17,3628.83 v1(5550,3550) ; IC.10 5691.25,2555 5815,2555 v1(5820,2560)
  Bottom Layer w10: v1(5550,3550) 5402.5,3402.5 5402.5,2840.32 5402.5,2740.32 5451.25,2691.57 5703.47,2691.57 5757.91,2637.14 5757.91,2622.09 v1(5820,2560)
NetC13_1: C13.1 IC2.3 R13.1 | length 347.3
  Top Layer w10: v1(5240,3840) 5276.91,3803.09 5276.91,3785.42 5312.48,3749.84 R13.1 C13.1
  Bottom Layer w10: v1(5240,3840) 5240,3893.74 IC2.3
NetC14_1: C14.1 K11.3 | length 478.7
  Top Layer w10: C14.1 6742.48,2277.52 K11.3
NetC14_2: C14.2 D3.2 IC.29 | length 435.7
  Top Layer w10: D3.2 6430,2213 6293.75,2349.25 IC.29 6422.48,2350 C14.2
NetD1_2: D1.2 RE1.A2 T1.1 | length 1549.5
  Top Layer w10: D1.2 4848.94,3604.88 5098.52,3355.3 5098.52,3321.04 5155.23,3264.33 5234.77,3264.33 5254.33,3283.89 5254.33,3284.33 T1.1 5254.33,3315.67 T1.1@5254.33,3316.11
  Bottom Layer w10: RE1.A2 4545.55,3357.64 4792.79,3604.88 D1.2
NetD2_1: D2.1 IC.11 R3.1 R6.2 | length 1149.3
  Top Layer w10: D2.1 4596.04,2500 4606.04,2490 R3.1 R6.2 4979.84,2490 4991.57,2478.27 4991.57,2468.43 5030,2430 5398.28,2430 5418.28,2450 IC.11
NetIC2_1: IC2.1 R11.1 R14.1 | length 445.4
  Top Layer w10: R14.1@5107.52,3999.84 R14.1 5110,3992.48 R11.1 v1(5110,4200)
  Bottom Layer w10: v1(5110,4200) 5110,4189.18 5130,4169.18 5130,4160 IC2.1
NetIC2_2: IC2.2 R12.2 R15.2 | length 474.1
  Top Layer w10: R12.2 5298.1,4332.48 R15.2@5309.83,4344.21 ; R15.2@5298.1,4338.27 R15.2 R15.2@5309.83,4344.21 ; IC2.2 5268.46,4097.8 5268.46,4209.02 5309.83,4250.39 R15.2@5309.83,4344.21
NetIC2_6: IC2.6 R1.2 R8.2 | length 310.7
  Top Layer w10: IC2.6 5673.74,3900 R8.2 5727.52,3890.16 5777.68,3840 5802.32,3840 5842.48,3799.84 R1.2
NetIC2_7: IC2.7 R1.1 R5.2 | length 739.3
  Top Layer w10: IC2.7 5620.55,4066.81 5620.55,4083.19 5727.52,4190.16 R5.2 ; v1(5710,3787.6) 5730,3787.6 5732.4,3790 R1.1
  Bottom Layer w10: IC2.7 5530,3976.26 5530,3793.46 5535.86,3787.6 v1(5710,3787.6)
NetIC_1: IC.1 R19.1 | length 927.6
  Top Layer w10: IC.1 5846.25,3610 6420,3610 6462.48,3652.48 R19.1
NetIC_2: IC.2 K7.2 R16.2 | length 1458.1
  Top Layer w10: v1(6530,3440) 6710,3440 K7.2 6760,3580.6 6630.45,3710.16 R16.2
  Bottom Layer w10: IC.2 6011.98,3350 6153.55,3491.57 6478.43,3491.57 v1(6530,3440)
NetIC_7: IC.7 K5.2 | length 240.4
  Bottom Layer w10: K5.2 5455,2855 5681.25,2855 IC.7
NetIC_8: IC.8 K5.1 | length 240.4
  Bottom Layer w10: K5.1 5455,2755 5681.25,2755 IC.8
NetIC_12: IC.12 K9.1 | length 250.4
  Top Layer w10: K9.1 5450,2350 IC.12
NetIC_13: IC.13 K9.2 | length 250.4
  Top Layer w10: K9.2 5445,2255 5681.25,2255 IC.13
NetIC_14: IC.14 K9.3 | length 250.4
  Top Layer w10: K9.3 5445,2155 5681.25,2155 IC.14
NetIC_15: IC.15 K9.4 | length 250.4
  Top Layer w10: K9.4 5445,2055 5681.25,2055 IC.15
NetIC_16: IC.16 K9.5 | length 250.4
  Top Layer w10: K9.5 5445,1955 5681.25,1955 IC.16
NetIC_19: IC.19 R7.1 | length 2258.7
  Top Layer w10: v1(5180,2710) 5235.04,2765.04 R7.1
  Bottom Layer w10: v1(5180,2710) 5180,1650 5440,1390 5500,1390 5589,1479 5589,1552.75 IC.19
NetIC_20: IC.20 K4.1 | length 1006.5
  Bottom Layer w10: IC.20 5727.82,1508.43 6518.43,1508.43 6580,1570 K4.1
NetIC_21: IC.21 K4.2 | length 406
  Top Layer w10: IC.21 6530,1550 K4.2
NetIC_22: IC.22 K4.3 | length 406
  Top Layer w10: IC.22 6530,1650 K4.3
NetIC_23: IC.23 K6.2 | length 895.9
  Top Layer w10: K6.2 5551.57,1691.57 5686.62,1691.57 5745.05,1750 IC.23
NetIC_24: IC.24 K6.3 | length 895.9
  Bottom Layer w10: K6.3 5804.53,1700 5954.53,1850 IC.24
NetIC_27: IC.27 K11.1 | length 645
  Bottom Layer w10: IC.27 6483.75,1960 K11.1
NetIC_28: IC.28 K11.4 | length 709.2
  Bottom Layer w10: IC.28 6388.8,2250 6556.3,2082.5 6682.5,2082.5 K11.4
NetIC_30: IC.30 K11.5 | length 656.7
  Top Layer w10: IC.30 6343.75,2500 v1(6520,2500)
  Bottom Layer w10: v1(6520,2500) 6520,2480 6617.56,2480 6737.56,2360 K11.5
NetIC_33: IC.33 K10.1 | length 755.1
  Bottom Layer w10: IC.33 6435.74,2608.01 6435.74,2314.26 K10.1
NetIC_34: IC.34 K10.2 | length 755.1
  Bottom Layer w10: IC.34 6455.74,2688.01 6455.74,2394.26 K10.2
NetIC_35: IC.35 K12.4 R22.1 | length 1104.8
  Top Layer w10: IC.35 6380,3036.25 v1(6380,3090) ; R22.1 6462.48,3312.48 6434.14,3284.14 6434.14,3275.86 6440,3270 v1(6510,3270)
  Bottom Layer w10: IC.35 6720,2950 6720,2930 K12.4 ; v1(6380,3090) 6380,3140 v1(6510,3270)
NetIC_36: IC.36 K12.2 R21.1 | length 1187.8
  Top Layer w10: IC.36 6163.43,3050 6130,3083.43 6130,3245.05 6276.53,3391.57 6349.09,3391.57 6375.94,3418.43 6385.79,3418.43 6397.52,3430.16 R21.1
  Bottom Layer w10: IC.36 6539.4,3050 6559.4,3070 K12.2
NetIC_37: IC.37 K12.3 | length 688.3
  Bottom Layer w10: IC.37 6252.18,3108.43 6252.18,3032.78 6278.3,3006.65 6295.89,3006.65 6332.55,2970 K12.3
NetIC_38: IC.38 K12.5 | length 705.1
  Top Layer w10: IC.38 6763.23,2780.52 6789.48,2780.52 K12.5@6800,2770
NetIC_39: IC.39 K12.7 | length 702.2
  Bottom Layer w10: IC.39 6460,3350 6486.57,3350 6714.07,3122.5 6827.5,3122.5 K12.7
NetIC_40: IC.40 K12.9 | length 1255.9
  Bottom Layer w10: IC.40 6232.18,3388.43 6232.18,2952.78 6293.38,2891.57 6629.74,2891.57 6698.82,2822.5 6852.5,2822.5 6852.5,2830.32 6880,2857.82 K12.9
NetK2_1: K2.1 RE1.12 RE1.24 | length 1131
  Bottom Layer w10: K2.1 4310.08,2750 RE1.12 4724.02,3062.36 RE1.24
NetK3_1: K3.1 R2.1 R4.2 R9.2 R13.2 | length 2319
  Top Layer w10: R9.2 5147.52,3740 R13.2 5247.52,3730.16 5279.25,3698.43 5834.99,3698.43 6040,3903.43 6040,4012.48 v1(5980,4072.48) 5905.45,4072.48 5867.93,4110 5795.58,4110 R4.2 ; K3.1 5462.57,4690.43 5462.57,4672.24 5804.96,4329.84 R2.1 5900,4320 v1(5990,4230)
  Bottom Layer w10: v1(5980,4072.48) 5985,4077.48 5985,4225 v1(5990,4230)
NetK8_1: K8.1 L2.3 | length 994.5
  Bottom Layer w10: K8.1 5970,4617.45 6457.45,4130 L2.3
NetK8_2: K8.2 L2.2 | length 1141.3
  Bottom Layer w10: K8.2 6423.2,4700 6515.99,4792.8 6827.2,4792.8 6850,4770 6850,4600 L2.2
NetL2_1: L2.1 T3.2 | length 359.7
  Top Layer w10: T3.2 6660,4550 L2.1
NetR7_2: R7.2 R10.2 T1.2 | length 590.2
  Top Layer w10: R10.2 5262.48,3384.69 5220,3342.21 T1.2 5226,3306 5226,3318.55 5284.05,3376.6 5337.54,3376.6 5343.4,3370.74 5343.4,3213.4 5300,3170 R7.2
NetR11_2: R11.2 R12.1 | length 162.7
  Top Layer w10: R11.2 5180,4111.94 R12.1
NetR17_2: R17.2 T2.2 T4.1 T5.2 | length 588.3
  Top Layer w10: T2.2 6440,4162.32 6462.48,4139.84 R17.2 6462.48,4074.52 6494.21,4042.79 6494.21,3894.21 T4.1
  Bottom Layer w10: T4.1 6500,3900 T5.2
NetR18_1: R18.1 T2.3 T5.3 | length 656.2
  Top Layer w10: R18.1 6472.48,4286 6490,4268.48 T2.3 6582.77,4167.23 6582.77,3946.79 6679.56,3850 T5.3
NetR18_2: R18.2 T3.1 | length 383.2
  Top Layer w10: R18.2 6407.52,4587.52 T3.1
NetR19_2: R19.2 R20.1 T4.2 | length 316.9
  Top Layer w10: R19.2 6409.25,3731.73 6409.25,3858.81 6440,3889.56 T4.2 6440,3898.48 6450.75,3909.23 6450.75,3998.27 R20.1
VCC: B1.3 C1.1 K7.3 K12.1 R3.2 R16.1 R21.2 R22.2 | length 4508.5
  Top Layer w10: B1.3 4643.39,2726.61 4669.17,2726.61 4840.82,2554.96 R3.2 4862.4,2543.23 4917.21,2543.23 4938.71,2521.73 5002.79,2521.73 5011.57,2512.95 5011.57,2476.71 5038.28,2450 5390,2450 5548.43,2608.43 5703.47,2608.43 5990,2894.95 5990,3205.05 6276.53,3491.57 6410.47,3491.57 6429.25,3472.79 6429.25,3396.93 ; R22.2 6397.52,3359.84 6429.25,3391.57 6429.25,3396.93 ; R16.1 6565.49,3710.16 6660,3615.64 K7.3 6502.64,3490 6462.48,3449.84 R21.2 6462.48,3430.16 6429.25,3396.93
  Bottom Layer w10: C1.1 4630,1950 B1.3 ; K7.3 6800,3350 6780,3330 K12.1
VIN: R17.1 T2.1 T3.3 | length 766.4
  Top Layer w10: T2.1 6390,4137.52 R17.1
  Bottom Layer w10: T2.1 6390,4370 T3.3
pads on no net: IC.3 IC.4 IC.25 IC.26 K12.6 K12.8 L1.2 L1.3 RE1.14